# Altium PCB PCB2.PcbDoc
Units mil, origin at the board's own origin, x right, y up, seen from the top; angles counter-clockwise.
Board outline 5000 x 4000 mil, 4 copper layers (Top Layer, Internal Plane 1, Internal Plane 2, Bottom Layer), stack 18.2 mil thick; 36 components, 50 nets, 161 pads, 1 vias.
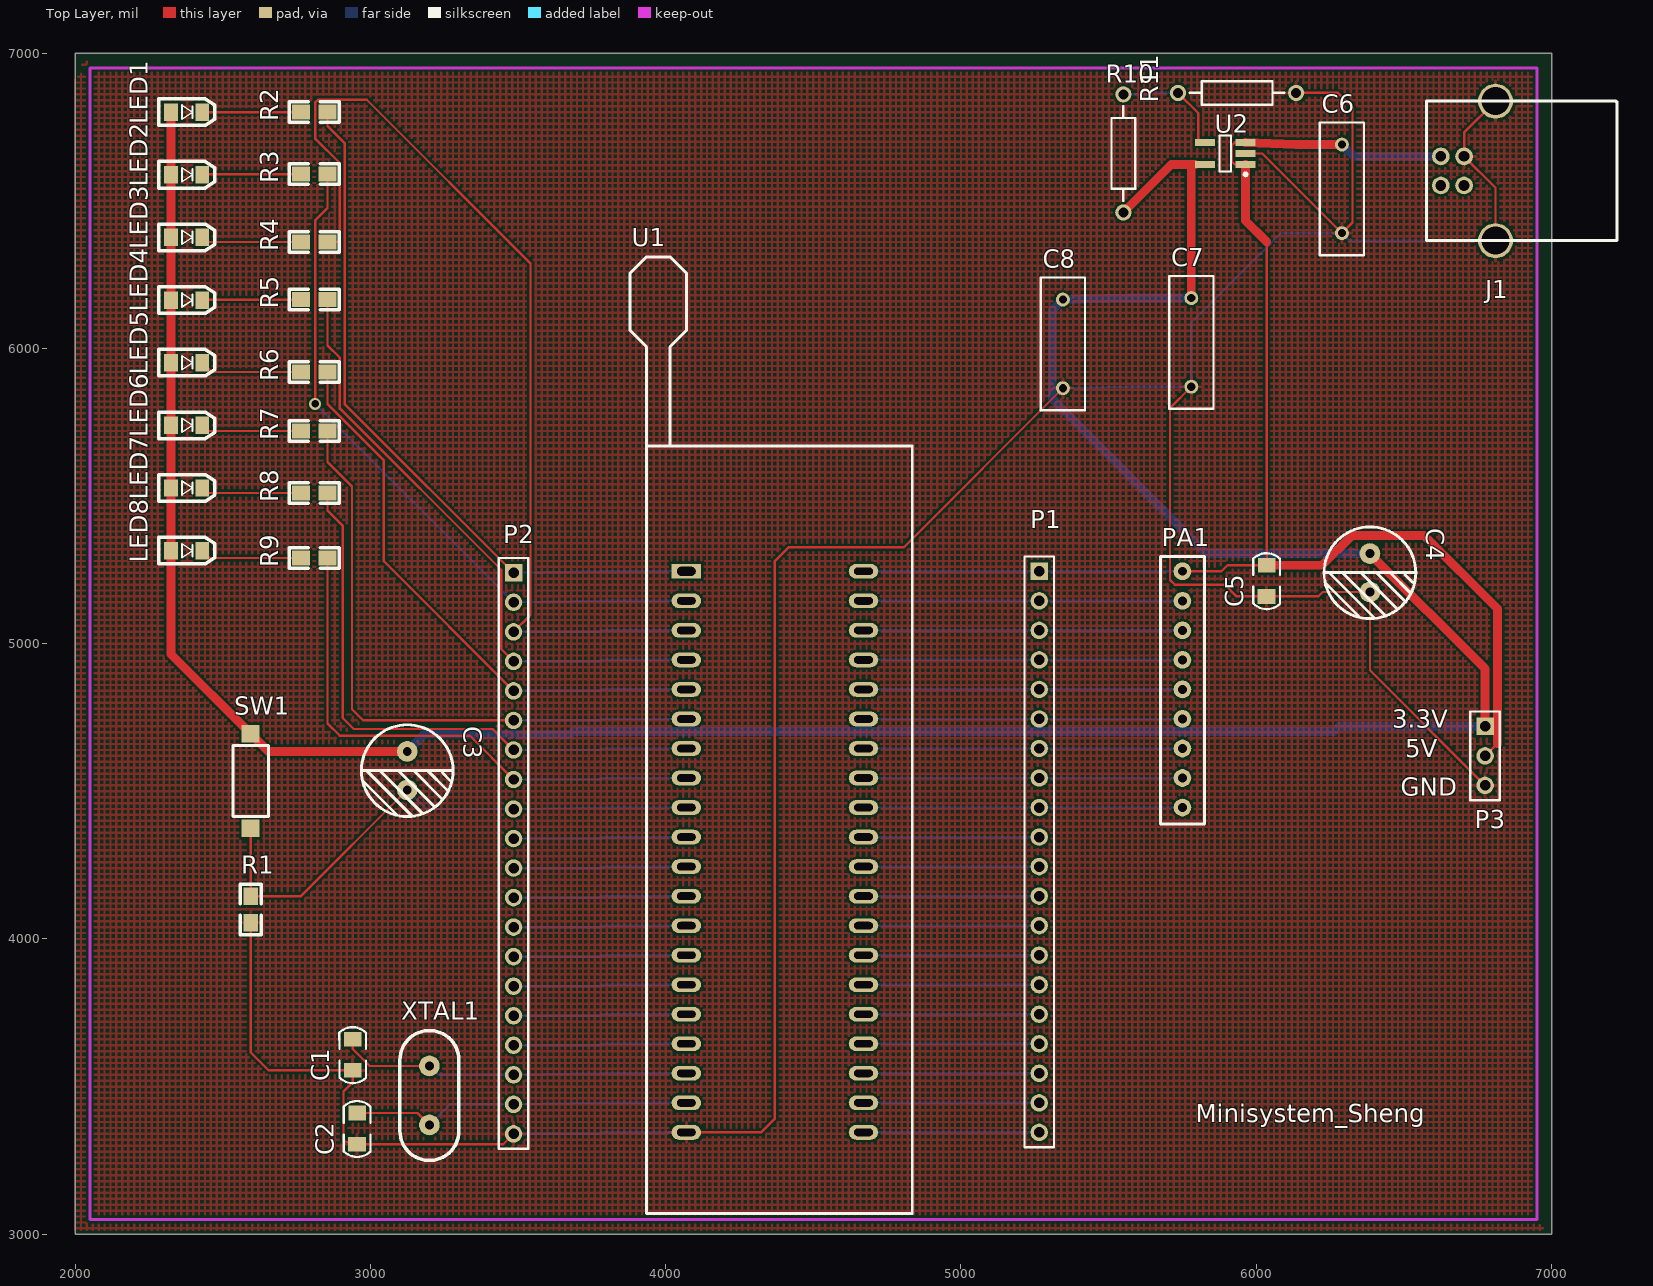
[diagram p0: Top Layer view]
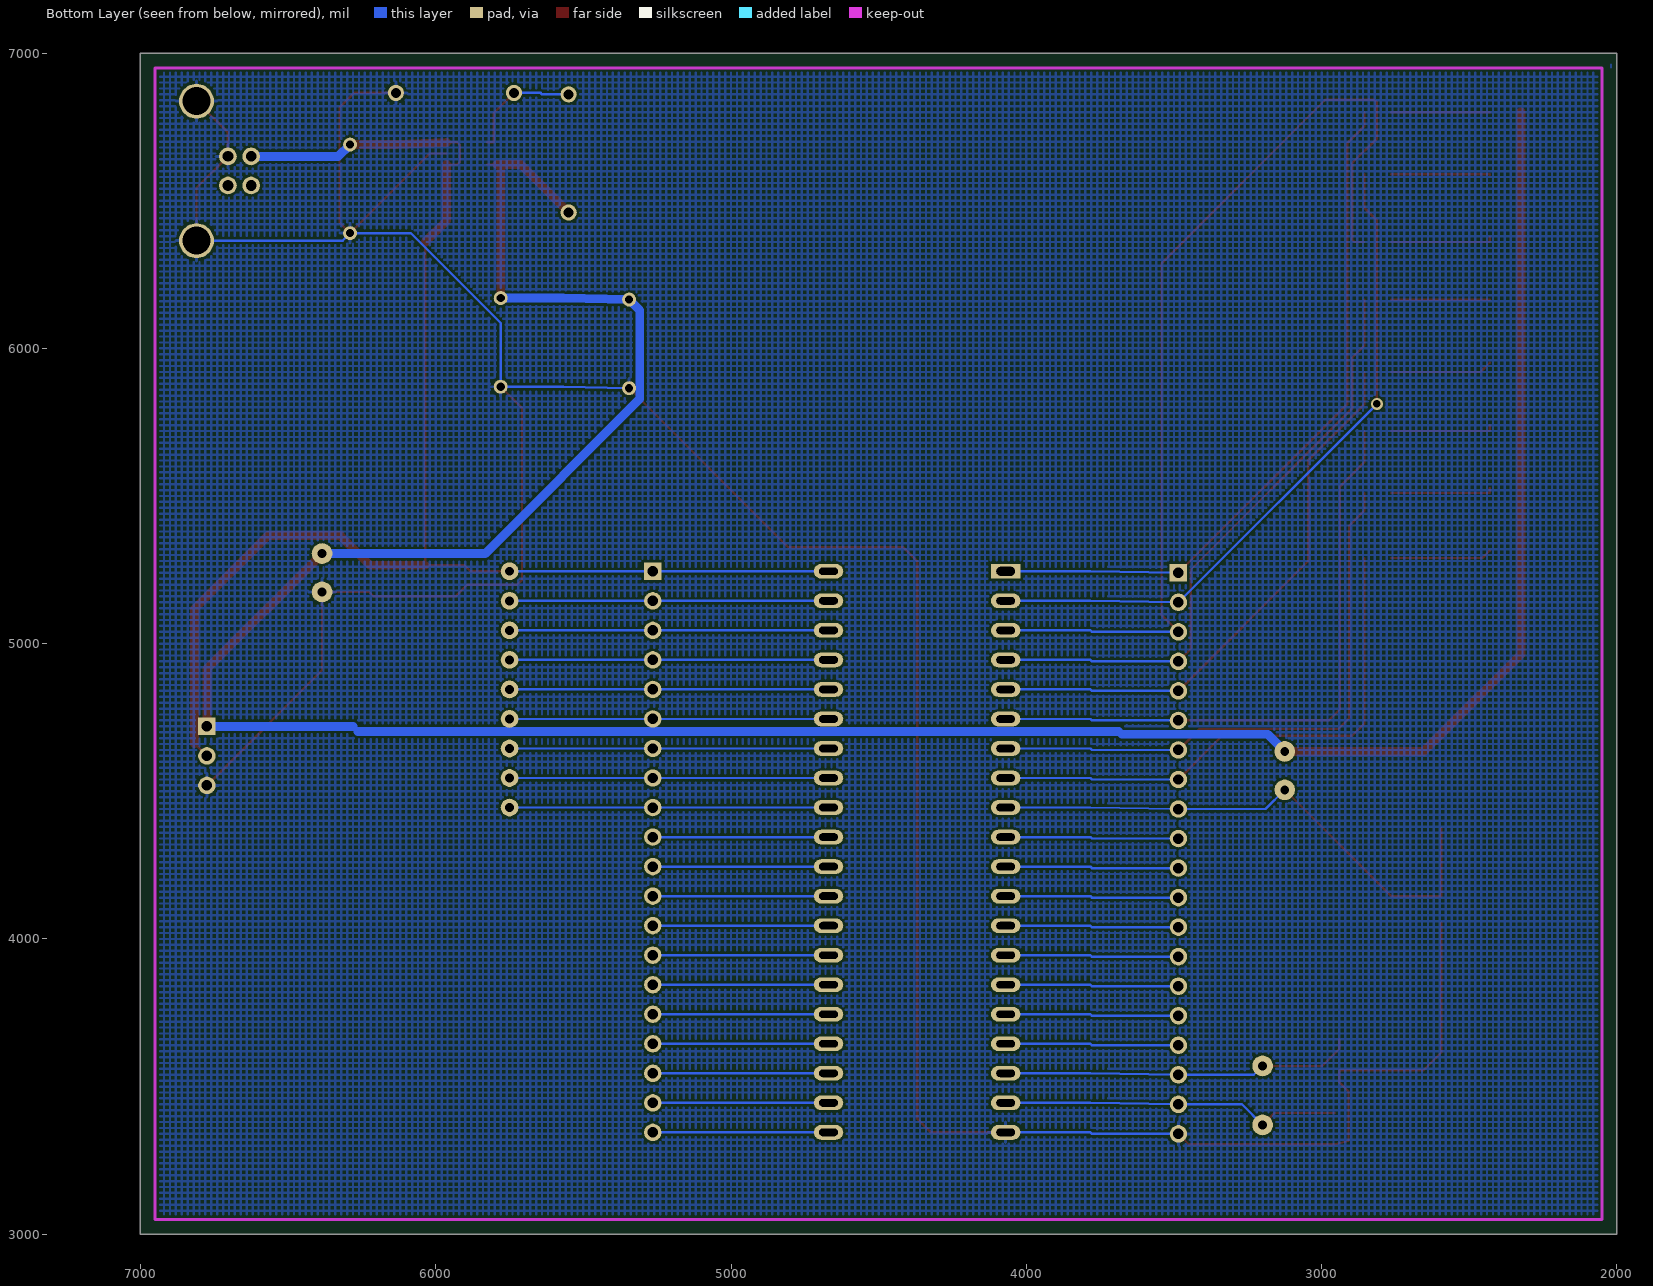
[diagram p1: Bottom Layer view, seen from below]
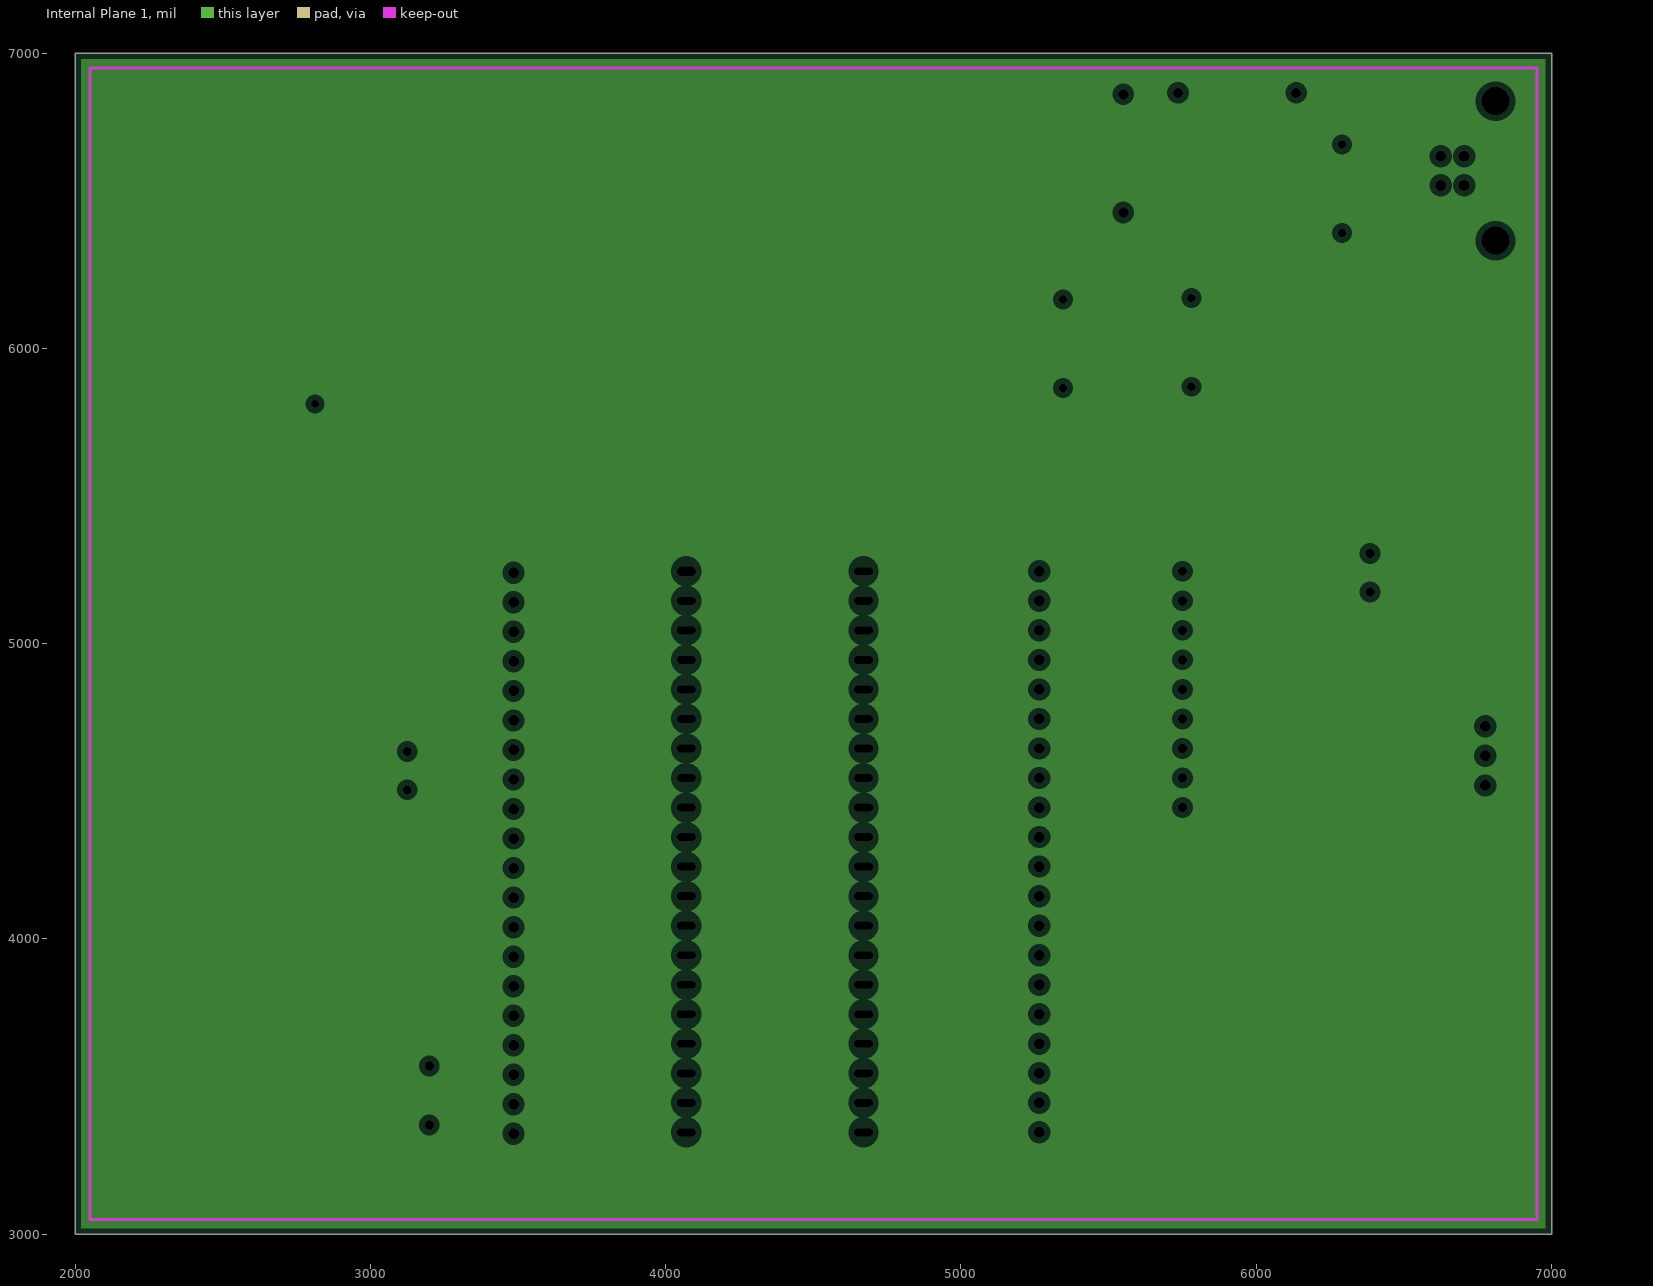
[diagram p2: Internal Plane 1, clearances drawn from the general rule]
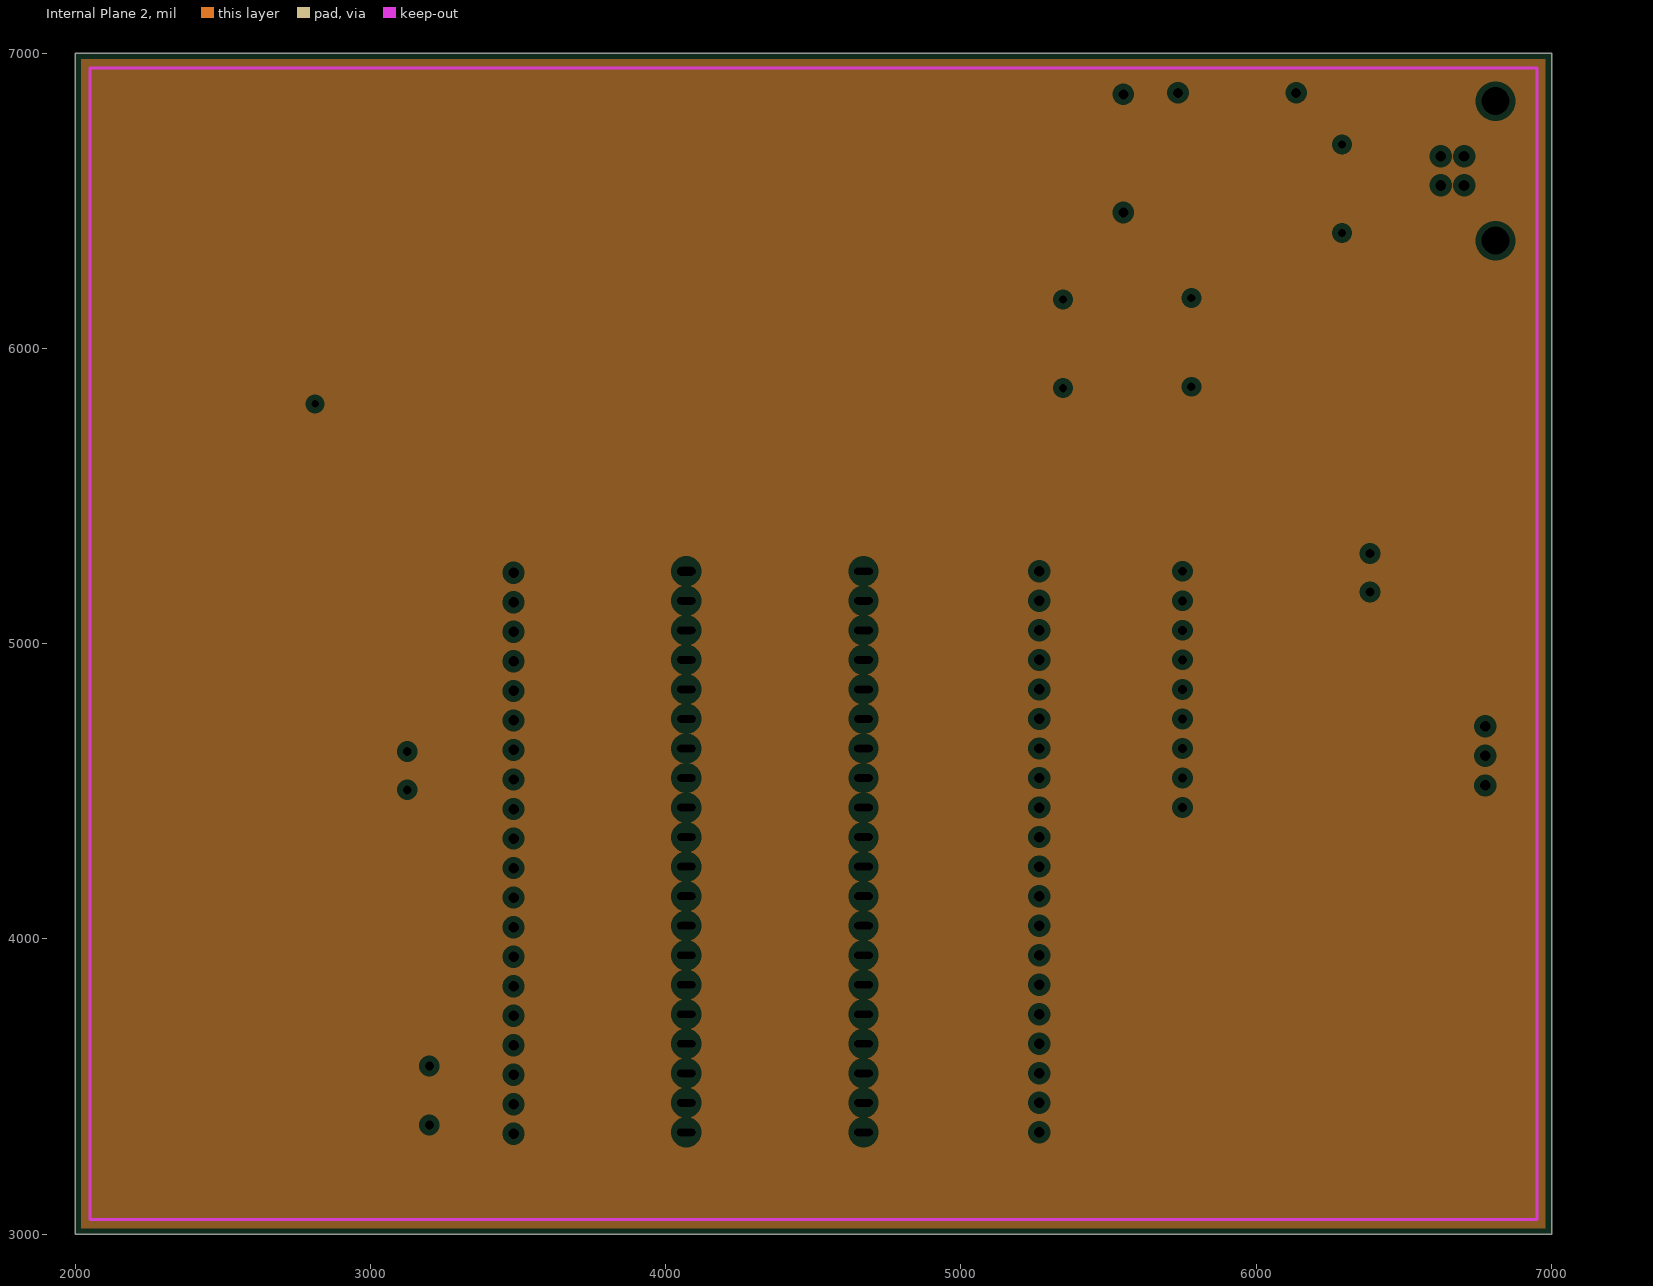
[diagram p3: Internal Plane 2, clearances drawn from the general rule]

## Layer stack, top to bottom
Top Solder: solder mask 0.4, Solder Resist, Dk 3.5
Top Layer: signal copper 1.4
Internal Plane 1: plane copper 1.4
Internal Plane 2: plane copper 1.4
Dielectric 1: dielectric 12.6, FR-4, Dk 4.8
Bottom Layer: signal copper 1.4
Bottom Solder: solder mask 0.4, Solder Resist, Dk 3.5

## Board outline
2000,3000 7000,3000 7000,7000 2000,7000

## Design rules (kind name [scope] priority, off if disabled: settings)
Clearance [All] p1: gap=8
PlaneClearance [All] p1: clearance=20
PlaneConnect [All] p1: planeconnectstyle=Relief reliefexpansion=20 reliefentries=4 reliefconductorwidth=10 reliefairgap=10
PolygonConnect [All] p1: connectstyle=Relief reliefconductorwidth=10 reliefentries=4 polygonreliefangle="90 Angle" airgapwidth=10
RoutingVias [All] p1: holewidth=25 width=40 viastyle="Through Hole" minholewidth=28 minwidth=50 maxholewidth=28 maxwidth=50
SolderMaskExpansion [All] p1: expansion=4
UnpouredPolygon [All] p1: allowunpoured=FALSE
Width [All] p1: maxlimit=8 minlimit=8 preferedwidth=8
27 further rules are at their usual default settings.

## Components (designator, comment, footprint, x,y, rotation, side; value= is the part's Value field where it differs from the comment)
C1 "22" 0805C 2940,3555 r90 top
C2 "22" 0805C 2955,3305 r90 top
C3 "CAPD" RB470U 3125,4570 r270 top
C4 "CAPD" RB470U 6385,5240 r270 top
C5 "Cap Semi" 0805C 6035,5160 r90 top
C6 "Cap" RAD-0.3 6290,6540 r90 top
C7 "Cap" RAD-0.3 5780,6020 r90 top
C8 "Cap" RAD-0.3 5345,6015 r90 top
J1 "USB" USB-B 6625,6650 r180 top
LED1 "LED" 0805-LED 2325,6800 r180 top
LED2 "LED" 0805-LED 2325,6587.86 r180 top
LED3 "LED" 0805-LED 2325,6375.71 r180 top
LED4 "LED" 0805-LED 2325,6163.57 r180 top
LED5 "LED" 0805-LED 2325,5951.43 r180 top
LED6 "LED" 0805-LED 2325,5739.29 r180 top
LED7 "LED" 0805-LED 2325,5527.14 r180 top
LED8 "LED" 0805-LED 2325,5315 r180 top
P1 "Header 20" HDR1X20 5265,5245 r270 top
P2 "Header 20" HDR1X20 3485,5240 r270 top
P3 "Header 3" HDR1X3 6775,4720 r270 top (schematic designator P?)
PA1 "DIP9" DIP9 5750,5245 r0 top
R1 "10k" 0805 2595,4055 r90 top
R2 "10k" 0805 2855,6800 r180 top
R3 "10k" 0805 2855,6590 r180 top
R4 "10k" 0805 2855,6360 r180 top
R5 "10k" 0805 2855,6165 r180 top
R6 "10k" 0805 2855,5920 r180 top
R7 "10k" 0805 2855,5720 r180 top
R8 "10k" 0805 2855,5510 r180 top
R9 "10k" 0805 2855,5290 r180 top
R10 "Res2" AXIAL-0.4 5550,6660 r270 top
R11 "Res2" AXIAL-0.4 5935,6865 r180 top
SW1 "SW" SWD 2595,4375 r90 top
U1 "AT89C51" DIP40紧锁座 4070,5245 r0 top
U2 "MCP1824" SOT95P270X110-5N 5895,6660 r180 top
XTAL1 "CRYSTAL" XTAL 3200,3470 r90 top

## Footprints (in the part's own frame and the unit in brackets; to place one, negate y for a bottom-side part, rotate by r counter-clockwise, add the part's x,y. Pads: shape width x height; smd on the part's side, far side on the other; paste and mask are expansions set on the pad)
0805 [mil]
  rect 60x50 smd: 1(0,0) 2(90,0)
  silkscreen extent -40,-35 130,35
0805-LED [mm]
  rect 1.2x1.5 smd: 1(0,0) 2(-2.686,0)
  silkscreen extent -3.76,-1.14 1.07,1.14
0805C [mil]
  rect 50x60 smd: 1(0,0) 2(105.71,-0.32)
  silkscreen extent -43,-45 146,45
AXIAL-0.4 [mm] "Axial Device, Thru-Hole; 2 Leads; 0.4 in Pin Spacing"
  round 1.4 hole 0.85: 1(-5.08,0) 2(5.08,0)
  silkscreen extent -4.06,-1.02 4.06,1.02
DIP9 [mil]
  round 60 hole 30: 1(0,0) 2(0,-100) 3(0,-200) 4(0,-300) 5(0,-400) 6(0,-500) 7(0,-600) 8(0,-700) 9(0,-800)
  silkscreen extent -75,-855 75,50
DIP40紧锁座 [mil]
  rect 100x50 hole 30 slot 62.99 at 0 deg: 1(0,0)
  oval 100x50 hole 25 slot 62.99 at 0 deg: 2(0,-100) 3(0,-200) 4(0,-300) 5(0,-400) 6(0,-500) 7(0,-600) 8(0,-700) 9(0,-800) 10(0,-900) 11(0,-1000) 12(0,-1100) 13(0,-1200) 14(0,-1300) 15(0,-1400) 16(0,-1500) 17(0,-1600) 18(0,-1700) 19(0,-1800) 20(0,-1900) 21(600,-1900) 22(600,-1800) 23(600,-1700) 24(600,-1600) 25(600,-1500) 26(600,-1400) 27(600,-1300) 28(600,-1200) 29(600,-1100) 30(600,-1000) 31(600,-900) 32(600,-800) 33(600,-700) 34(600,-600) 35(600,-500) 36(600,-400) 37(600,-300) 38(600,-200) 39(600,-100) 40(600,0)
  silkscreen extent -190,-2175 765,1065
HDR1X3 [mm] "Connector; Header; 3 Position"
  rect 1.5x1.5 hole 0.9: 1(0,0)
  round 1.5 hole 0.9: 2(2.54,0) 3(5.08,0)
  silkscreen extent -1.27,-1.27 6.35,1.27
HDR1X20 [mm] "Connector; Header; 20 Position"
  rect 1.5x1.5 hole 0.9: 1(0,0)
  round 1.5 hole 0.9: 2(2.54,0) 3(5.08,0) 4(7.62,0) 5(10.16,0) 6(12.7,0) 7(15.24,0) 8(17.78,0) 9(20.32,0) 10(22.86,0) 11(25.4,0) 12(27.94,0) 13(30.48,0) 14(33.02,0) 15(35.56,0) 16(38.1,0) 17(40.64,0) 18(43.18,0) 19(45.72,0) 20(48.26,0)
  silkscreen extent -1.27,-1.27 49.53,1.27
RAD-0.3 [mm] "Radial Cap, Thru-Hole; 2 Leads; 0.3 in Pin Spacing"
  round 1.2 hole 0.7: 1(-3.81,0) 2(3.81,0)
  silkscreen extent -5.71,-1.91 5.71,1.91
RB470U [mil]
  round 70 hole 30: 1(-65,0) 2(65,0)
  silkscreen extent -155,-155 155,155
SOT95P270X110-5N [mm] "SOT23, 5-Leads, Body 2.90x2.70mm, Pitch 0.95mm, IPC Medium Density"
  rect 1.7x0.6 smd: 1(-1.75,0.95) 2(-1.75,0) 3(-1.75,-0.95) 4(1.75,-0.95) 5(1.75,0.95)
  silkscreen extent -1.88,-1.55 0.5,1.92, body extent -0.9,-1.55 0.9,1.55, height 1.1
SWD [mil]
  rect 60x60 smd: 1(-0.4,0.5) 2(319.6,0.5)
  silkscreen extent 40,-60 280,61
USB-B [mm]
  round 1.524 hole 0.92: 1(0,0) 2(0,2.5) 3(-2,2.5) 4(-2,0)
  round 3 hole 2.4: 5(-4.7,7.25) 6(-4.7,-4.75)
  silkscreen extent -15.15,-4.75 1.22,7.25
XTAL [mil]
  round 70 hole 30: 1(-100,0) 2(100,0)
  silkscreen extent -220,-100 220,100

## Part data
C1 C2: library part CAP, "C"
C5: "Capacitor (Semiconductor SIM Model)"
C6 C7 C8: "Capacitor"
P1 P2: "Header, 20-Pin"
P3: "Header, 3-Pin"
R1 R2 R3 R4 R5 R6 R7 R8 R9: library part R1, "R?"
R10 R11: "Resistor"

## Via types
v1: diameter 40, hole 25, Top Layer to Bottom Layer, 1 vias

## Nets (pads, with @x,y where several pads share a name; then routed paths per layer and width w, separated by ;. In a path a pad name is that pad's centre, name@x,y a point inside that pad or via, vN(x,y) a via of type N, cw(c..) or ccw(c..) an arc to the next point about the centre after c; other vN are vias at no path point)
+5: C5.2 C6.2 J1.1 P1.1 P3.2 PA1.1 U1.40 U2.1 U2.3 | length 5035.5
  Top Layer w8: PA1.1 5882,5245 5902.71,5265.71 C5.2 6035.32,6360.68 ; U2.1 5963,6622.6 5927.4,6622.6 5918,6632 5918,6688 5927.4,6697.4 U2.3 ; P3.2 6817,4662
  Top Layer w30: U2.1@5963,6622.6 5963,6433 6035.32,6360.68 ; U2.3 6134.4,6690 C6.2 ; C5.2 6222.71,5265.71 6323,5366 6569,5366 6817,5118 6817,4662
  Bottom Layer w8: U1.40 P1.1 PA1.1
  Bottom Layer w30: C6.2 6330,6650 J1.1
GND: C1.1 C2.1 C4.2 C5.1 C6.1 C7.1 C8.1 J1.4 J1.5 J1.6 P2.20 P3.3 R1.1 R11.1 U1.20 U2.2 | length 11339.7
  Top Layer w8: R1.1 2595,3616 2656,3555 C1.1 2940,3514 2909,3483 2909,3316 C2.1 3450,3305 P2.20 ; U1.20 4323,3345 4370,3392 4370,5280 4416,5326 4806,5326 C8.1 ; C7.1 5708,5798 5708,5216 5724,5200 5893,5200 5933,5160 C5.1 6210,5160 6225,5175 C4.2 6385,4910 P3.3 ; U2.2 6020,6660 C6.1 6326,6426 6326,6816 6277,6865 R11.1 ; J1.5 6810.04,6543.7 J1.4 6703.74,6730.71 J1.6
  Bottom Layer w8: P2.20 3778,3340 3783,3345 U1.20 ; C8.1 5568,5870 C7.1 5780,6086 6084,6390 C6.1 6315.43,6364.57 J1.5
LED1: P2.1 R2.1 U1.1 | length 2406
  Top Layer w8: R2.1 2855,6753 2913,6695 2913,5812 P2.1
  Bottom Layer w8: P2.1 3783,5245 U1.1
LED2: P2.2 R3.1 U1.2 | length 2330.8
  Top Layer w8: v1(2813,5812) 2813,6433 2855,6475 R3.1
  Bottom Layer w8: v1(2813,5812) P2.2 3783,5145 U1.2
LED3: P2.3 R4.1 U1.3 | length 3365.8
  Top Layer w8: R4.1 2889,6360 2897,6368 2897,6627 2813,6711 2813,6832 2823,6842 2988,6842 3542.53,6287.47 3542.53,5097.53 P2.3
  Bottom Layer w8: P2.3 3778,5040 3783,5045 U1.3
LED4: P2.4 R5.1 U1.4 | length 2073
  Top Layer w8: R5.1 2855,6010 2897,5968 2897,5796 3443,5250 3443,4982 P2.4
  Bottom Layer w8: P2.4 3778,4940 3783,4945 U1.4
LED5: P2.5 R6.1 U1.5 | length 1928
  Top Layer w8: R6.1 2855,5811 3046,5620 3046,5279 P2.5
  Bottom Layer w8: P2.5 3778,4840 3783,4845 U1.5
LED6: P2.6 R7.1 U1.6 | length 2126.2
  Top Layer w8: R7.1 2855,5615 2938,5532 2938,4778 2976,4740 P2.6
  Bottom Layer w8: P2.6 3778,4740 3783,4745 U1.6
LED7: P2.7 R8.1 U1.7 | length 1993.3
  Top Layer w8: R8.1 2855,5451 2906,5400 2906,4749 2944,4711 3414,4711 P2.7
  Bottom Layer w8: P2.7 3778,4640 3783,4645 U1.7
LED8: P2.8 R9.1 U1.8 | length 1855.8
  Top Layer w8: R9.1 2855,4730 2897,4688 3337,4688 P2.8
  Bottom Layer w8: P2.8 3778,4540 3783,4545 U1.8
NetLED1_2: LED1.2 R2.2 | length 334.3
  Top Layer w8: LED1.2 R2.2
NetLED2_2: LED2.2 R3.2 | length 336.4
  Top Layer w8: LED2.2 2430.75,6590 R3.2
NetLED3_2: LED3.2 R4.2 | length 350
  Top Layer w8: LED3.2 2430.75,6360 R4.2
NetLED4_2: LED4.2 R5.2 | length 335.7
  Top Layer w8: LED4.2 2430.75,6165 R5.2
NetLED5_2: LED5.2 R6.2 | length 347.3
  Top Layer w8: LED5.2 2462.18,5920 R6.2
NetLED6_2: LED6.2 R7.2 | length 353.5
  Top Layer w8: LED6.2 2430.75,5720 R7.2
NetLED7_2: LED7.2 R8.2 | length 351.4
  Top Layer w8: LED7.2 2430.75,5510 R8.2
NetLED8_2: LED8.2 R9.2 | length 344.6
  Top Layer w8: LED8.2 2455.75,5290 R9.2
NetP1_10: P1.10 U1.31 | length 595
  Bottom Layer w8: U1.31 P1.10
NetP1_11: P1.11 U1.30 | length 595
  Bottom Layer w8: U1.30 P1.11
NetP1_12: P1.12 U1.29 | length 595
  Bottom Layer w8: U1.29 P1.12
NetP1_13: P1.13 U1.28 | length 595
  Bottom Layer w8: U1.28 P1.13
NetP1_14: P1.14 U1.27 | length 595
  Bottom Layer w8: U1.27 P1.14
NetP1_15: P1.15 U1.26 | length 595
  Bottom Layer w8: U1.26 P1.15
NetP1_16: P1.16 U1.25 | length 595
  Bottom Layer w8: U1.25 P1.16
NetP1_17: P1.17 U1.24 | length 595
  Bottom Layer w8: U1.24 P1.17
NetP1_18: P1.18 U1.23 | length 595
  Bottom Layer w8: U1.23 P1.18
NetP1_19: P1.19 U1.22 | length 595
  Bottom Layer w8: U1.22 P1.19
NetP1_20: P1.20 U1.21 | length 595
  Bottom Layer w8: U1.21 P1.20
NetP2_10: P2.10 U1.10 | length 587.1
  Bottom Layer w8: P2.10 3778,4340 3783,4345 U1.10
NetP2_11: P2.11 U1.11 | length 587.1
  Bottom Layer w8: P2.11 3778,4240 3783,4245 U1.11
NetP2_12: P2.12 U1.12 | length 587.1
  Bottom Layer w8: P2.12 3778,4140 3783,4145 U1.12
NetP2_13: P2.13 U1.13 | length 587.1
  Bottom Layer w8: P2.13 3778,4040 3783,4045 U1.13
NetP2_14: P2.14 U1.14 | length 587.1
  Bottom Layer w8: P2.14 3778,3940 3783,3945 U1.14
NetP2_15: P2.15 U1.15 | length 587.1
  Bottom Layer w8: P2.15 3778,3840 3783,3845 U1.15
NetP2_16: P2.16 U1.16 | length 587.1
  Bottom Layer w8: P2.16 3778,3740 3783,3745 U1.16
NetP2_17: P2.17 U1.17 | length 587.1
  Bottom Layer w8: P2.17 3778,3640 3783,3645 U1.17
NetR10_1: R10.1 R11.2 U2.4 | length 405.4
  Top Layer w8: R11.2 5804,6796 5804,6697.4 U2.4
  Bottom Layer w8: R10.1 5640,6860 5645,6865 R11.2
P00: P1.2 PA1.2 U1.39 | length 1080
  Bottom Layer w8: U1.39 P1.2 PA1.2
P01: P1.3 PA1.3 U1.38 | length 1080
  Bottom Layer w8: U1.38 P1.3 PA1.3
P02: P1.4 PA1.4 U1.37 | length 1080
  Bottom Layer w8: U1.37 P1.4 PA1.4
P03: P1.5 PA1.5 U1.36 | length 1080
  Bottom Layer w8: U1.36 P1.5 PA1.5
P04: P1.6 PA1.6 U1.35 | length 1080
  Bottom Layer w8: U1.35 P1.6 PA1.6
P05: P1.7 PA1.7 U1.34 | length 1080
  Bottom Layer w8: U1.34 P1.7 PA1.7
P06: P1.8 PA1.8 U1.33 | length 1080
  Bottom Layer w8: U1.33 P1.8 PA1.8
P07: P1.9 PA1.9 U1.32 | length 1080
  Bottom Layer w8: U1.32 P1.9 PA1.9
RST: C3.2 P2.9 R1.2 SW1.1 U1.9 | length 1880.7
  Top Layer w8: SW1.1 2594.5,4326 2595,4288 R1.2 2765,4145 C3.2
  Bottom Layer w8: C3.2 3190,4440 P2.9 3783,4445 U1.9
VCC: C3.1 C4.1 C7.2 C8.2 LED1.1 LED2.1 LED3.1 LED4.1 LED5.1 LED6.1 LED7.1 LED8.1 P3.1 R10.2 SW1.2 U2.5 | length 10084
  Top Layer w8: 5780,6610.6 5792,6622.6 U2.5
  Top Layer w30: LED1.1 LED2.1 LED3.1 LED4.1 LED5.1 LED6.1 LED7.1 LED8.1 2325,4964.1 SW1.2 2654.1,4635 C3.1 ; R10.2 5712.6,6622.6 5792,6622.6 ; C7.2 5780,6610.6 ; C4.1 6775,4915 P3.1
  Bottom Layer w8: 3677,4693 3687,4703 ; 6263,4703 6280,4720
  Bottom Layer w30: C3.1 3183,4693 3677,4693 ; 3687,4703 6263,4703 ; C7.2 5568,6170 C8.2 5309,6129 5309,5829 5833,5305 C4.1 ; 6280,4720 P3.1
X1: C1.2 P2.18 U1.18 XTAL1.2 | length 1199.1
  Top Layer w8: C1.2 2940.32,3627.68 2998,3570 XTAL1.2
  Bottom Layer w8: XTAL1.2 3230,3540 P2.18 3783,3545 U1.18
X2: C2.2 P2.19 U1.19 XTAL1.1 | length 1160.6
  Top Layer w8: C2.2 3159.29,3410.71 XTAL1.1
  Bottom Layer w8: XTAL1.1 3270,3440 P2.19 3783,3445 U1.19
pads on no net: J1.2 J1.3

## Polygon pours and split planes (outlines as drawn)
GND on Bottom Layer "Top Layer" (hatched 90Degree grid 20 track 8, pour order 4): 2015,6955 2020,6960 6935,6960 6935,3100 6950,3085 6905,3040 2030,3040 2030,6915 2050,6935
GND on Top Layer "Top Layer" (hatched 90Degree grid 20 track 8, pour order 6): 2025,6960 2035,6970 6940,6970 6940,3050 6975,3015 2000,3015 2000,6910 2030,6940 2025,6945 2025,6955

## Keep-outs
Keep-Out Layer:
  lines w10: 2050,3050 6950,3050 6950,6950 2050,6950 2050,3050

## Silkscreen, mask and mechanical layers (free items; w line width, h text height)
Top Overlay:
  text "3.3V" at 6460,4715 h60
  text "5V" at 6505,4615 h60
  text "GND" at 6490,4485 h60
  text "Minisystem_Sheng" at 5795,3380 h60
Drill Drawing:
  text ".LEGEND" at 7200,3200 h60
  text "Drill Drawing." at 7200,3100 h60

## Dimensions
2050,3050 to 6950,3050 on Mechanical 1
2050,3050 to 2050,6950 on Mechanical 1